# Allegro board CH340E_CAN_V10_230905.brd
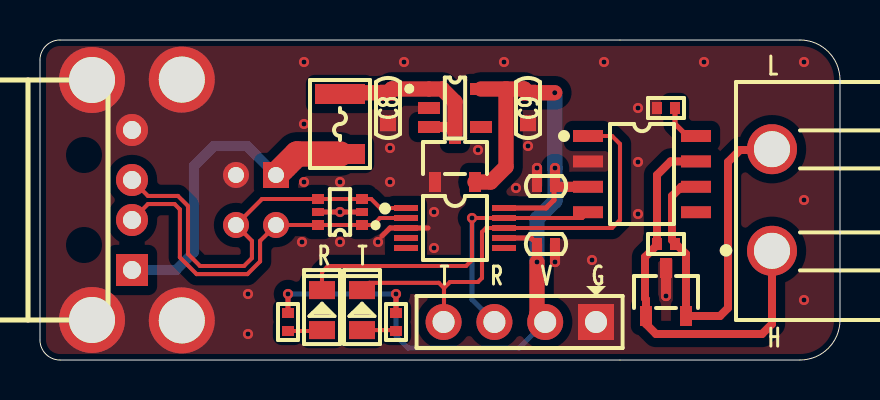
[diagram p0: board, top side]
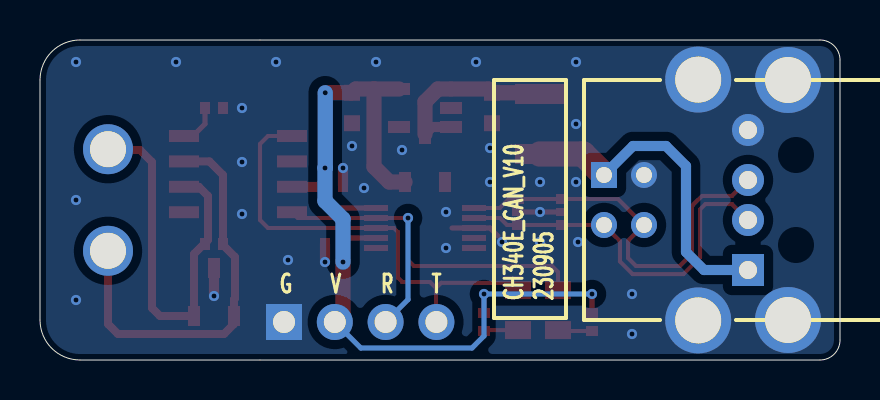
[diagram p1: board, bottom side, seen from below]

Outline 40 x 16 mm; copper layers: TOP, BOTTOM. Coordinates in mm from the lower left corner of the outline.
Outline path: 0,15 arc(0.29,15.71) 1,16 38,16 arc(39.41,15.41) 40,14 40,2 arc(39.41,0.59) 38,0 1,0 arc(0.29,0.29) 0,1 0,15

## Design rules (mm)
constraint set DEFAULT: min track width 0.203, pair gap 0.203
net group USB_D: nets USB_DM USB_DP

## Placement (name value [footprint] x y rotation side)
C5  100nF_50V  [C0402]  25.3 5.8 180 top
C8  10uF_10V  [C0603]  17.4 12.6 90 top
C9  10uF_10V  [C0603]  24.4 12.6 270 top
C11  100nF_50V  [C0402]  25.3 8.7 0 top
D1  LED_RED  [LED0805]  16.1 2.5 90 top
D2  LED_GREEN  [LED0805]  14.1 2.5 90 top
F1  SMD1210-200  [FUSE1210]  15 11.8 90 top
J1  -  [CN1X4-2P54-Z]  27.8 1.9 180 top
J4  -  [WJ2EDGRC-5R08-2P]  36.6 8 90 top
NOREF  -  []  0 0 0 top
NOREF#2  -  []  0 0 90 top
R1  4.7K  [R0402]  17.8 1.9 90 top
R2  4.7K  [R0402]  12.4 1.9 90 top
R4  0R  [R0402]  31.3 12.6 180 top
R5  120R/NI  [R0402]  31.3 5.8 180 top
U1  CH340E  [MSOP10]  20.75 6.6 270 top
U2  TPD4E1U06DCKR  [SOT363]  15 7.4 90 top
U4  XC6206P332MR  [SOT23-3]  20.75 10.1 0 top
U6  SPX3819M5-L-3-3/NI  [SOT23-5]  20.75 12.6 270 top
U8  SN65HVD230DR  [SOIC8]  30.1 9.3 270 top
U9  PESD1CAN/NI  [SOT23-3]  31.3 3.4 0 top
USB1  -  [USB-A-MALE]  4.8 8 180 top
USB2  -  [USB-B]  11.8 8 180 bottom

## Library data of the parts
C5 C11 = CAP NP_2
C8 C9 = CAP NP
D1 D2 = LED_4
F1 = FUSE
J1 = CONN RCPT 4
J4 = CONN RCPT 2
R1 R2 R4 R5 = R_Generic
U1 = CH340E
U2 = TPD4E1U06DBVR
U4 = XC6206P332MR
U6 = SPX3819M5-L-1-2
U8 = TJA1050
U9 = PESD1CAN
USB1 = USB-A-MALE
USB2 = USB-B

## Footprints (pads in the part's own frame, mm; a bottom-side part is the same pattern mirrored in y, then rotated)
C0402
  rect 0.5x0.6 smd: 1(-0.45,0) 2(0.45,0)
C0603
  rect 0.8x0.8 smd: 1(-0.762,0) 2(0.762,0)
CN1X4-2P54-Z
  rect 1.8x1.8 hole 1.1: 1(0,0)
  round 1.8 hole 1.1: 2(2.54,0) 3(5.08,0) 4(7.62,0)
FUSE1210
  rect 1x2.5 smd: 1(-1.5,0) 2(1.5,0)
LED0805
  rect 0.9x1.3 smd: 1(-1,0) 2(1,0)
MSOP10
  rect 0.3x1.2 smd: 1(-1,-2.45) 2(-0.5,-2.45) 3(0,-2.45) 4(0.5,-2.45) 5(1,-2.45) 6(1,2.45) 7(0.5,2.45) 8(0,2.45) 9(-0.5,2.45) 10(-1,2.45)
R0402
  rect 0.5x0.6 smd: 1(-0.45,0) 2(0.45,0)
SOIC8
  rect 0.6x1.5 smd: 1(-1.9,-2.7) 2(-0.63,-2.7) 3(0.64,-2.7) 4(1.91,-2.7) 5(1.91,2.7) 6(0.64,2.7) 7(-0.63,2.7) 8(-1.9,2.7)
SOT23-3
  rect 0.6x1 smd: 1(-1,-1.2) 2(1,-1.2) 3(0,1.2)
SOT23-5
  rect 0.6x1.1 smd: 1(-0.95,-1.3) 2(0,-1.3) 3(0.95,-1.3) 4(0.95,1.3) 5(-0.95,1.3)
SOT363
  rect 0.5x0.6 smd: 1(-0.65,-1.1) 3(0.65,-1.1) 4(0.65,1.1) 6(-0.65,1.1)
  rect 0.4x0.6 smd: 2(0,-1.1) 5(0,1.1)
USB-A-MALE
  rect 1.6x1.6 hole 0.9: 1(0.2,3.5)
  round 1.6 hole 0.9: 2(0.2,1) 3(0.2,-1) 4(0.2,-3.5)
  round 3.3 hole 2.3: 5(2.2,6) 6(2.2,-6)
USB-B
  rect 1.3x1.3 hole 0.8: 1(0,1.25)
  round 1.3 hole 0.8: 2(0,-1.25) 3(2,-1.25) 4(2,1.25)
  round 3.3 hole 2.3: 5(4.71,6.02) 6(4.71,-6.02)
WJ2EDGRC-5R08-2P
  round 2.5 hole 1.8: 1(-2.54,0) 2(2.54,0)

## Nets
GND: C5.1 C8.1 C9.2 C11.1 J1.1 R4.2 U1.3 U2.2 U2.5(NC) U4.1(VSS) U6.2 U8.2 U9.3 USB1.4 USB1.5 USB1.6 USB2.4 USB2.5 USB2.6
VCC_3.3V: C5.2 C9.1 C11.2 J1.2 R1.2 R2.2 U1.7(VCC) U1.10 U4.2 U6.5(VOUT) U8.3
VCC_USB: C8.2 F1.2 U4.3 U6.1 U6.3
CAN_H: J4.1 R5.2 U8.7 U9.1
CAN_L: J4.2 R5.1 U8.6 U9.2
CH340E_RXD: D2.2(CATHODE) J1.3 U1.9 U8.4
CH340E_TXD: D1.2(CATHODE) J1.4 U1.8 U8.1
USB_DM: U1.2 U2.1 U2.6 USB1.2 USB2.2
USB_DP: U1.1 U2.3 U2.4 USB1.3 USB2.3
N17444119: D1.1 R1.1
N17444179: D2.1 R2.1
N17494883: F1.1 USB1.1(VBUS) USB2.1(VBUS)
N17509802: R4.1 U8.8

Pads without a net: U1 4 5 6; U6 4; U8 5

## Via types
v1: diameter 0.508, hole 0.254, TOP to BOTTOM, 37 vias

## Routing (per net, layer and track width the routed paths; a pad name or vN(x,y) marks a point on that pad's centre or on a via; arc(x,y) is an arc through that point)
GND: length 7.9
  TOP w0.254: U2.2 v1(15,7.4) U2.5 ; 17.1,6.2 17.5,6.6 U1.3 19.4,6.6
  TOP w0.508: C11.1 v1(24.85,9.6) ; C5.1 v1(25.75,4.9) ; U9.3 v1(31.3,3.2)
  vias: v1(10.4,3.3) v1(10.4,1.3) v1(13.1,5.9) v1(13.2,14.9) v1(13.2,11.8) v1(13.2,8.9) v1(15,8.9) v1(15,5.9) v1(16.9,5.9) v1(17.5,10.6) v1(17.5,8.9) v1(18.2,14.9) v1(19.7,7.4) v1(19.7,5.6) v1(21.9,10.5) v1(23.2,14.9) v1(23.8,8.6) v1(24.4,10.7) v1(27.6,5) v1(28.2,14.9) v1(29.9,12.6) v1(29.9,9.9) v1(29.9,7.3) v1(33.2,14.9) v1(38.2,14.9) v1(38.2,8) v1(38.2,3)
VCC_3.3V: length 47.8
  TOP w0.254: C11.2 25.7,8.65 25.7,8 25.3,7.6 U1.10 ; R2.2 v1(12.4,3.3) ; C5.2 24.55,6.1 U1.7 ; R1.2 v1(17.8,3.3)
  TOP w0.508: v1(25.75,9.6) C11.2 25.79,8.66 U8.3 ; C5.2 v1(24.85,4.9)
  TOP w0.762: 23.3,13.55 24.21,13.55 C9.1 v1(25.74,13.36) ; 23.3,13.55 23.3,9.66 22.54,8.9 U4.2 ; 23.3,13.55 U6.5 ; J1.2 24.85,2.31 v1(24.85,4.9)
  BOTTOM w0.254: J1.2 23.96,0.6 18.4,0.6 17.8,1.2 v1(17.8,3.3) v1(12.4,3.3)
  BOTTOM w0.762: v1(24.85,4.9) 24.85,7.05 25.75,7.95 v1(25.75,9.6) 25.74,9.61 v1(25.74,13.36)
VCC_USB: length 9.2
  TOP w0.508: U6.3 20.4,11.65 U4.3
  TOP w0.762: F1.2 15.06,13.36 C8.2 17.59,13.55 U6.1 20.1,13.55 20.75,12.9 U4.3
CAN_H: length 20.3
  TOP w0.4: U8.7 31.53,9.93 30.85,9.25 R5.2 30.85,5.75 30.25,5.15 30.25,3.08 30.3,3.03 U9.1 30.3,1.8 30.8,1.3 36.1,1.3 36.6,1.8 J4.1
CAN_L: length 19.7
  TOP w0.4: J4.2 36.56,10.5 35,10.5 34.4,9.9 34.4,2.6 34,2.2 U9.2 32.3,5.3 31.8,5.8 R5.1 31.75,5.85 31.6,6 31.6,8.2 32.06,8.66 U8.6
CH340E_RXD: length 22.3
  TOP w0.203: U8.4 27.11,7.1 U1.9 v1(21.6,7.1) 21.6,5 21.3,4.7 14.4,4.7 14.1,4.4 D2.2
  BOTTOM w0.254: J1.3 21.6,3.02 v1(21.6,7.1)
CH340E_TXD: length 23.2
  TOP w0.203: J1.4 20.2,1.92 20.2,3.6 ; 20.2,3.6 19.94,3.86 16.46,3.86 D1.2 ; 20.2,3.6 20.5,3.9 21.9,3.9 22.1,4.1 22.1,6.4 22.3,6.6 U1.8 28.6,6.6 29,7 29,10.8 28.6,11.2 U8.1
USB_DM: length 18.6
  TOP w0.203: U1.2 17,7.1 16.65,6.75 U2.1 U2.6 USB2.2 11,5.95 11,4.93 10.37,4.29 7.83,4.29 6.99,5.13 6.99,7.53 6.73,7.8 5.4,7.8 USB1.2
USB_DP: length 20.6
  TOP w0.203: USB1.3 5.4,8.2 6.9,8.2 7.4,7.7 7.4,5.3 8,4.7 10.2,4.7 10.6,5.1 10.6,5.95 USB2.3 11.1,8.05 U2.4 U2.3 16.56,8.05 17.01,7.6 U1.1
N17444119: length 1.7
  TOP w0.203: R1.1 17.75,1.5 D1.1
N17444179: length 1.7
  TOP w0.203: R2.1 14.05,1.45 D2.1
N17494883: length 16.5
  TOP w1.27: F1.1 12.85,10.3 USB2.1
  BOTTOM w0.508: USB1.1 6.8,4.5 7.7,5.4 7.7,9.7 8.7,10.7 10.35,10.7 USB2.1
N17509802: length 2.1
  TOP w0.254: R4.1 31.75,11.8 32.35,11.2 U8.8

## Copper pours and planes (outline as drawn; the poured copper is in the pictures)
GND on TOP: 38,15.7 39.2,15.2 39.7,14 39.7,2 39.2,0.8 38,0.3 1,0.3 0.51,0.51 0.3,1 0.3,15 0.51,15.49 1,15.7 ; 3 cut-outs
GND on BOTTOM: 38,15.7 39.2,15.2 39.7,14 39.7,2 39.2,0.8 38,0.3 1,0.3 0.51,0.51 0.3,1 0.3,15 0.51,15.49 1,15.7

## Text on the board
Ref Des/Silkscreen Bottom: T | R | V | G | 230905 | CH340E_CAN_V10
Ref Des/Silkscreen Top: R | T | V | G | L | H
DEVICE_TYPE_TOP: FIGURE | FINISHED_SIZE | 0.254 | 0.8 | 0.9 | 1.1 | 1.8 | 2.3 | DRILL CHART: TOP to BOTTOM | ALL UNITS ARE IN MILLIMETERS | PLATED | QTY | 37 | 4 | 2 | 55 | TOTAL HOLES:
